# Altium PCB 精简焊台.PcbDoc
Units mil, origin at the board's own origin, x right, y up, seen from the top; angles counter-clockwise.
Board outline 2756 x 2101 mil, 2 copper layers (Top Layer, Bottom Layer), stack 12.8 mil thick; 94 components, 71 nets, 279 pads, 155 vias.
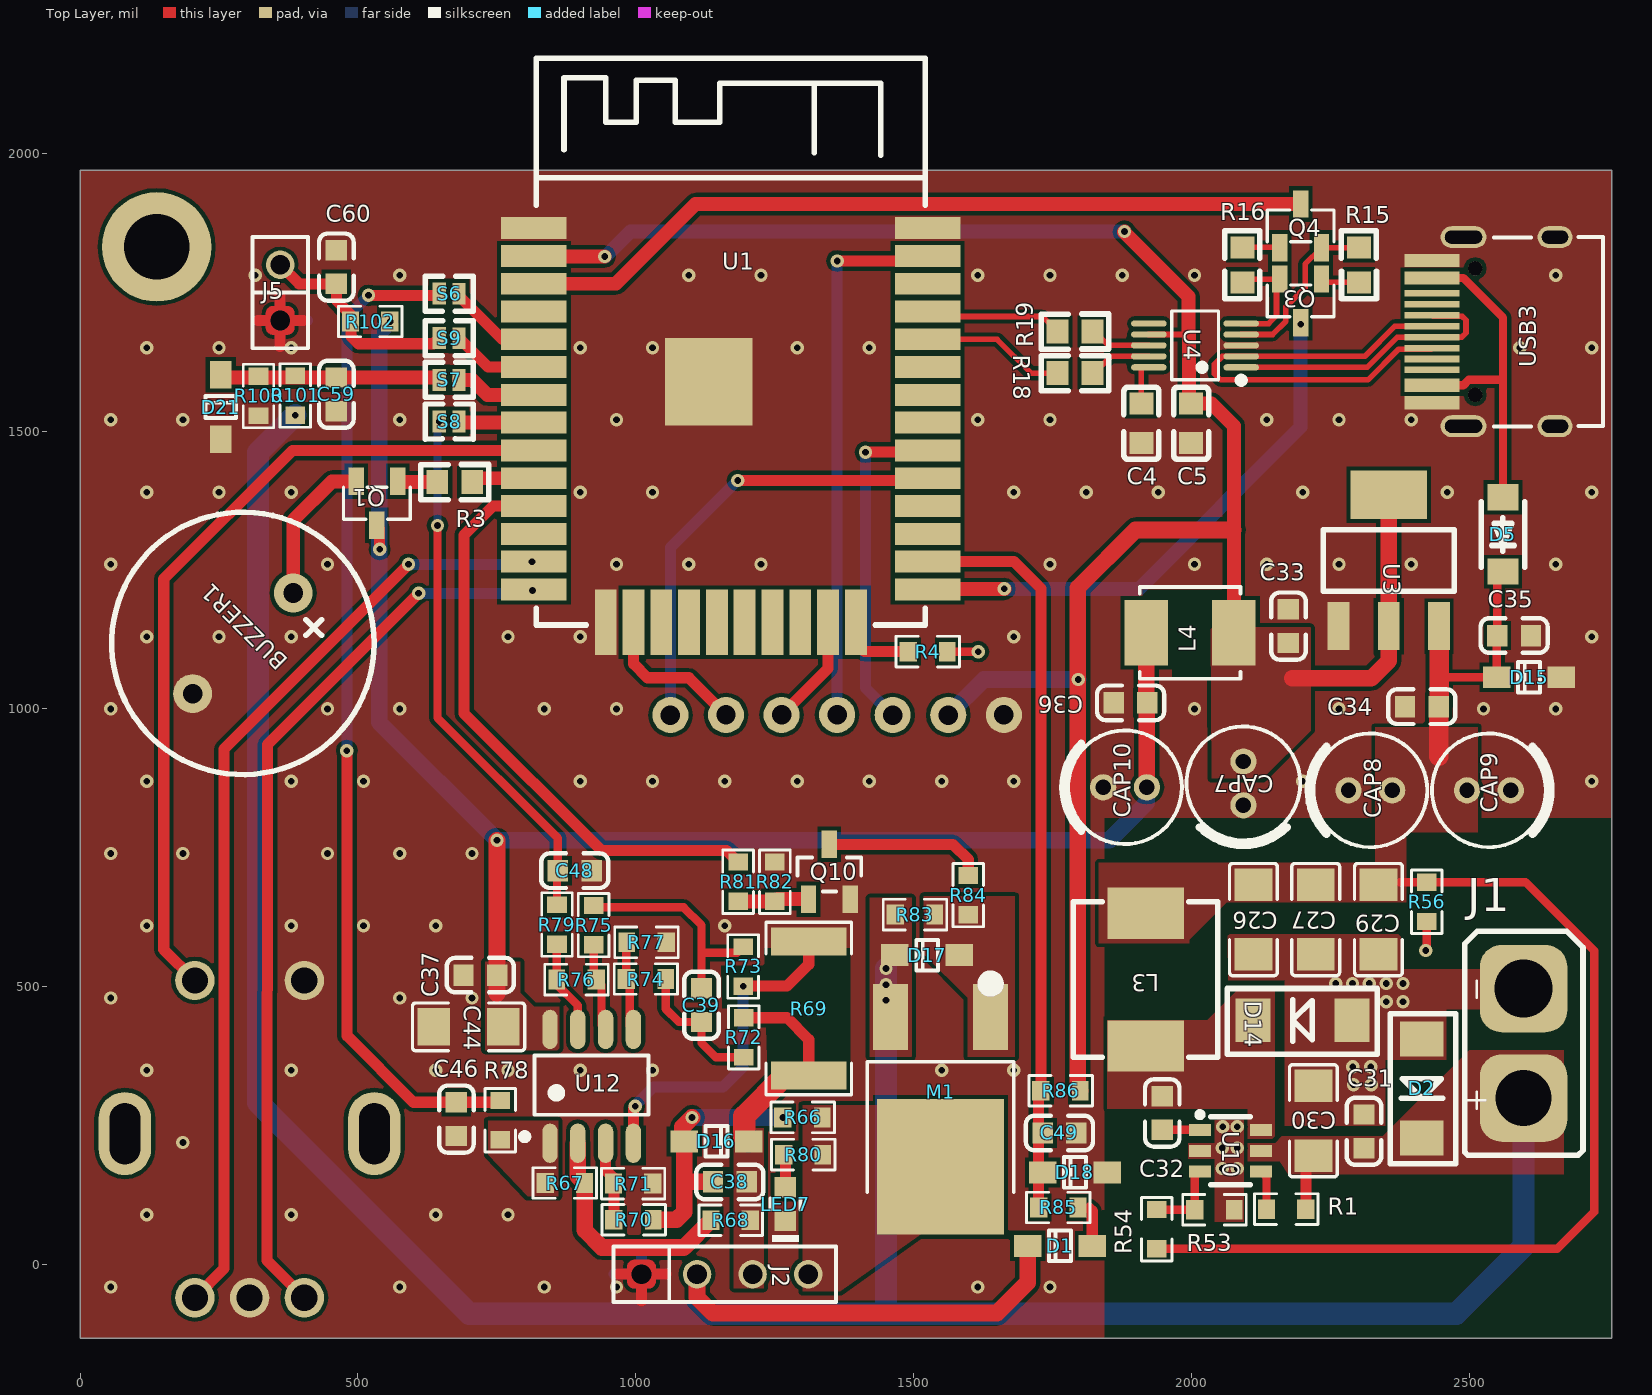
[diagram p0: Top Layer view]
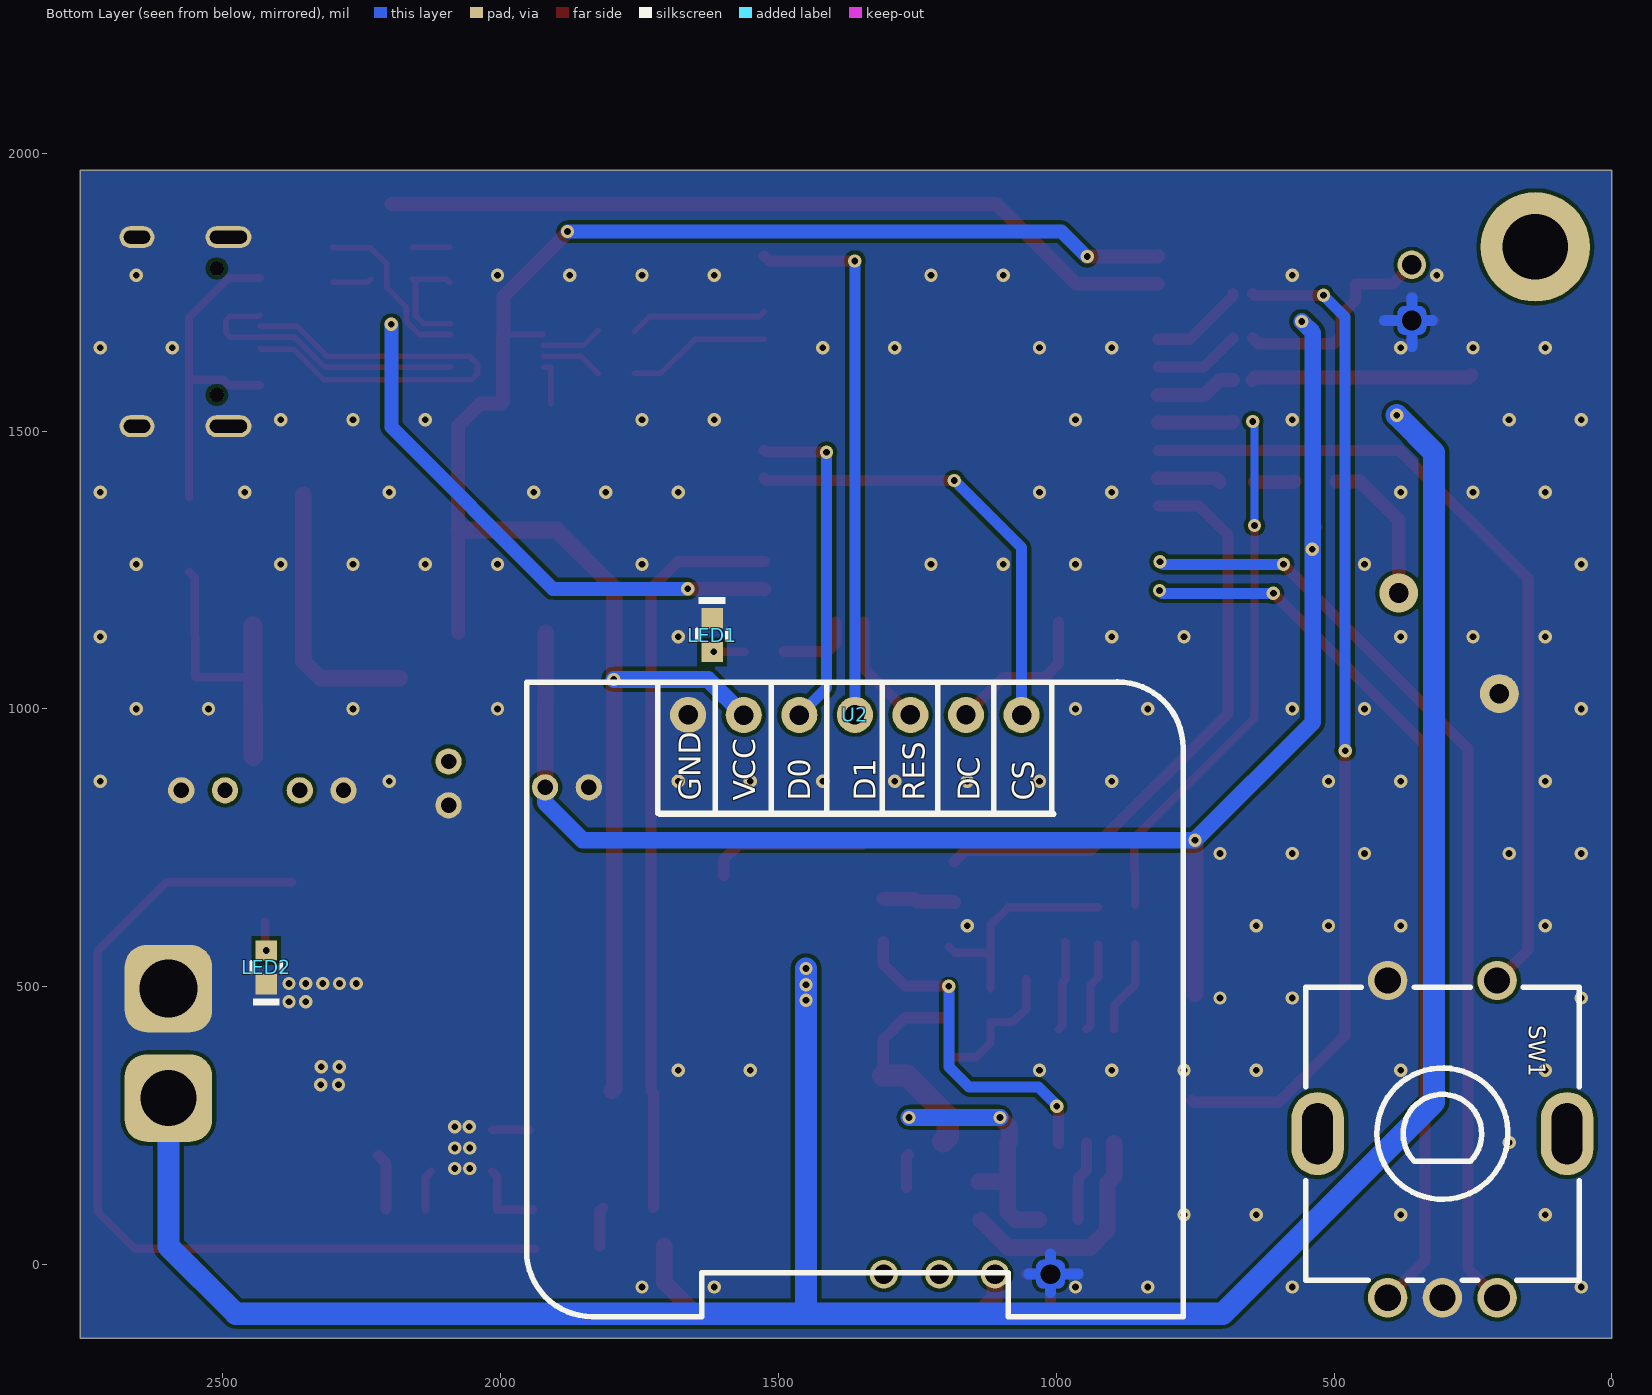
[diagram p1: Bottom Layer view, seen from below]
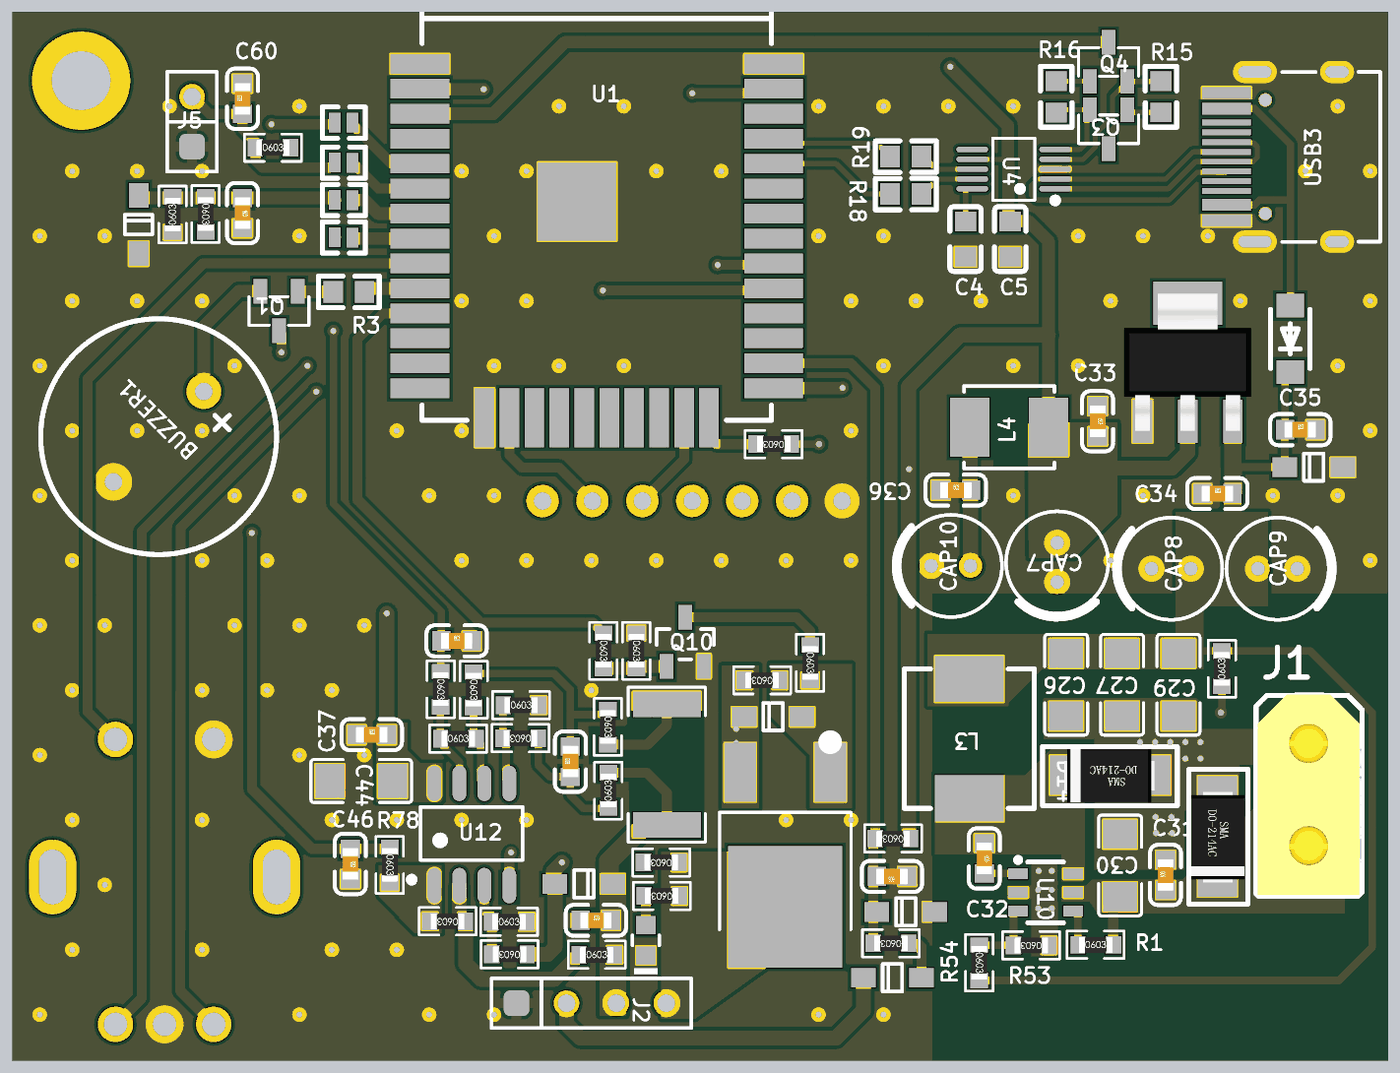
[diagram p2: 3D render of the assembled board from above, using the file's embedded part models]

## Layer stack, top to bottom
Top Solder: solder mask 0.4, Solder Resist, Dk 3.5
Top Layer: signal copper 1.4
Dielectric 1: core 10, FR-4, Dk 4.2
Bottom Layer: signal copper 1.4
Bottom Solder: solder mask 0.4, Solder Resist, Dk 3.5

## Board outline
0,-132 0,1969 2756,1969 2756,-132

## Design rules (kind name [scope] priority, off if disabled: settings)
Clearance [All] p1: gap=7 ignorepadtopadclearanceinfootprint=FALSE
PolygonConnect PolygonConnect_2 [All] p1: connectstyle=Direct reliefconductorwidth=10 reliefentries=4 polygonreliefangle="90 Angle" airgapwidth=10
PolygonConnect PolygonConnect_1 [IsVia] p2: connectstyle=Direct reliefconductorwidth=10 reliefentries=4 polygonreliefangle="90 Angle" airgapwidth=10
PolygonConnect [All] p3: connectstyle=Relief reliefconductorwidth=10 reliefentries=4 polygonreliefangle="90 Angle" airgapwidth=10
RoutingVias [All] p1: holewidth=28 width=50 viastyle="Through Hole" minholewidth=28 minwidth=50 maxholewidth=28 maxwidth=50
SolderMaskExpansion [All] p1: expansion=2.5
Width Width_1 [InNetClass('New Class')] p1: maxlimit=100 minlimit=10 preferedwidth=20
Width [All] p2: maxlimit=100 minlimit=10 preferedwidth=10
30 further rules are at their usual default settings.

## Classes and differential pairs
net class "New Class": 5V AVCC DVCC NetC38_2 NetD17_1 NetJ2_4 VBUS VIN

## Components (designator, comment, footprint, x,y, rotation, side; value= is the part's Value field where it differs from the comment)
BUZZER1 "GMC1205YA-16R2048" BUZ-TH_BD12.0-P6.50-D0.6-FD 293,1118 r45 top
C4 "1u" C0603 1909.5,1514 r270 top
C5 "10u" C0603 1999,1514 r90 top
C26 "10uF" 电容 2120,625 r270 top
C27 "10uF" 电容 2232.03,625 r270 top
C29 "0.1uF" 电容 2345,625 r270 top
C30 "4.7uF" 电容 2210,255 r90 top
C31 "0.1uF" 0603C 2310,240 r90 top
C32 "0.1uF" 0603C 1947,273 r270 top
C33 "0.1uF" 0603C 2174,1149 r270 top
C34 "0.1uF" 0603C 2414,1004 r0 top
C35 "0.1uF" 0603C 2580,1132 r0 top
C36 "0.1uF" 0603C 1890,1011 r0 top
C37 "0.1uF" 0603C 720,521 r0 top
C38 "0.1uF" 0603C 1169,149 r0 top
C39 "0.1uF" 0603C 1118,467 r90 top
C44 "4.7uF" 电容 695,437 r0 top
C46 "10nF" 0603C 677,262 r270 top
C48 "10nF" 0603C 890,709 r0 top
C49 "0.1uF" 0603C 1762,237 r180 top
C59 "1uF" 0603C 461,1566 r270 top
C60 "1uF" 0603C 461,1795 r90 top
CAP7 "22uF" CAPX-5.0 2093,866 r90 top
CAP8 "22uF" CAPX-5.0 2321.37,853.51 r0 top
CAP9 "100uF" CAPX-5.0 2534.63,853.51 r180 top
CAP10 "22uF" CAPX-5.0 1880,859 r0 top
D1 "1N4148" LC-SOD-123 1763,34 r0 top
D2 "TVS" "二极管 SMA(DO-214AC)" 2414,398.56 r270 top
D5 "1N5819HW-7-F" SOD-123_L2.8-W1.8-LS3.7-FD 2560,1314 r270 top
D14 "B5819" "二极管 SMA(DO-214AC)" 2280.56,440 r180 top
D15 "SMA6.0A" LC-SOD-123 2607,1057 r0 top
D16 "1N4148" LC-SOD-123 1145,222 r180 top
D17 "ZMM12" LC-SOD-123 1524,557 r0 top
D18 "SMF3.3A" LC-SOD-123 1789.81,166 r0 top
D21 "SMF3.3A" LC-SOD-123 253,1543 r270 top
J1 "GH 2P" "端子 (XT30-F）" 2598,496 r270 top
J2 "CONN4" SIP-4 1010,-17 r0 top
J5 "NTC 10K" SIP-2 360,1699 r90 top
L3 "22uH" 电感 1912,513 r90 top
L4 "22uH" LIN0520 1997,1137 r180 top
LED1 "LED" LC-0603-LED 1619,1132.69 r90 bottom
LED2 "LED" LC-0603-LED 2421,535 r270 bottom
LED7 "LED" LC-0603-LED 1269,109 r270 top
M1 "MOS-ASM6115" MOS-ASM6115 1573,279 r90 top
Q1 "S8050" SOT-23-3_L2.9-W1.3-P1.90-LS2.4-BR 534,1370 r90 top
Q3 "S8050" SOT-23-3_L2.9-W1.3-P1.90-LS2.4-BR 2196,1734 r90 top
Q4 "S8050" SOT-23-3_L2.9-W1.3-P1.90-LS2.4-BR 2196,1869 r270 top
Q10 "S8050" LC-SOT-23(SOT-23-3) 1348,707 r270 top
R1 "100K" 0603R 2170,100 r0 top
R3 "10k" R0603 674,1408 r0 top
R4 "2K" 0603R 1525,1103 r180 top
R15 "10k" R0603 2301,1799 r90 top
R16 "10k" R0603 2091,1799 r270 top
R18 "220R" R0603 1790,1604 r180 top
R19 "220R" R0603 1790,1679 r180 top
R53 "18K" 0603R 2041,99 r180 top
R54 "100K" 0603R 1937,64 r270 top
R56 "3K" 0603R 2423,653 r90 top
R66 "10K" 0603R 1300,265 r180 top
R67 "200K" 0603R 872,147 r180 top
R68 "2K" 0603R 1170.59,80 r0 top
R69 "0.02R" "检流电阻 - duplicate" 1321,458 r90 top
R70 "2K" 0603R 996,81 r180 top
R71 "200K" 0603R 995,146 r0 top
R72 "10R" 0603R 1194,409 r90 top
R73 "10R" 0603R 1193,536.57 r270 top
R74 "1K" 0603R 1018,514 r180 top
R75 "1K" 0603R 924,611 r270 top
R76 "20K" 0603R 893,513 r0 top
R77 "20K" 0603R 1019,580 r0 top
R78 "1K" 0603R 756,260 r270 top
R79 "10K" 0603R 858,612 r270 top
R80 "10K" 0603R 1301,198 r180 top
R81 "1K" 0603R 1184,689 r270 top
R82 "51K" 0603R 1250,689 r270 top
R83 "10K" 0603R 1502,630 r180 top
R84 "2K" 0603R 1598,665 r270 top
R85 "1K" 0603R 1760,103 r180 top
R86 "10K" 0603R 1764.22,313 r180 top
R100 "1K" 0603R 321,1563 r90 top
R101 "10K" 0603R 387,1564 r270 top
R102 "10K" 0603R 522,1697 r0 top
S6 "Solder" SW_HAND_WELD_JX 664,1747 r180 top
S7 "Solder" SW_HAND_WELD_JX 664,1592 r180 top
S8 "Solder" SW_HAND_WELD_JX 664,1517.09 r180 top
S9 "Solder" SW_HAND_WELD_JX 664,1667 r180 top
SW1 "Rotary Enc" SW-TH_PEC11R-4XXXF-SXXXX 305,226 r0 bottom
U1 "ESP32-S" WIRELM-SMD_ESP32-S 1170.67,1510.47 r0 top
U2 "0.96OLED" "OLED 12864 SPI 7P" 1362.05,989.15 r0 bottom
U3 "AMS1117" "LDO线性稳压 (SOT-223)" 2354.45,1267.11 r270 top
U4 "CH340E" MSOP-10_L3.0-W3.0-P0.50-LS5.0-BL 2006,1654 r90 top
U10 "LMR16006" "开关电源 (LMR16006)" 2085,210 r270 top
U12 "GS8552" LC-SOP-8-150MIL 920,321 r0 top
USB3 "USB-TYPEC-16P" USB-TYPE-C-16P 2653.7,1508.7 r90 top

## Footprints (in the part's own frame and the unit in brackets; to place one, negate y for a bottom-side part, rotate by r counter-clockwise, add the part's x,y. Pads: shape width x height; smd on the part's side, far side on the other; paste and mask are expansions set on the pad)
0603C [mm]
  rect 0.93x0.98 smd: 1(-0.77,0) 2(0.77,0)
  silkscreen extent -1.53,-0.79 1.54,0.79, body extent -0.8,-0.4 0.8,0.4, height 0.3
0603R [mm]
  rect 0.762x0.9 smd: 1(-0.9,0)
  rect 0.8x0.9 smd: 2(0.9,0)
  silkscreen extent -1.45,-0.7 1.45,0.7, body extent -0.85,-0.4 0.85,0.4, height 0.56
BUZ-TH_BD12.0-P6.50-D0.6-FD [mil]
  round 70 hole 35.4: 1(128,0) 2(-128,0)
  silkscreen extent -236,-236 236,236
C0603 [mm]
  rect 1x1.1 smd: 1(-0.9,0) 2(0.9,0)
  silkscreen extent -1.65,-0.8 1.65,0.8
CAPX-5.0 [mm]
  round 1.2 hole 0.7: 1(1,0) 2(-1,0)
  silkscreen extent -2.83,-2.6 2.6,2.6
LC-0603-LED [mm]
  rect 0.93x0.98 smd: A(-0.77,0) K(0.77,0)
  silkscreen extent -0.25,-0.69 1.72,0.69
LC-SOD-123 [mm]
  rect 1.25x1 smd: 1(1.475,0) 2(-1.475,0)
  silkscreen extent -0.5,-0.7 0.5,0.7
LC-SOP-8-150MIL [mm]
  oval 0.7x1.8 smd: 1(-1.893,-2.6) 2(-0.623,-2.6) 3(0.647,-2.6) 4(1.917,-2.6) 5(1.917,2.6) 6(0.647,2.6) 7(-0.623,2.6) 8(-1.893,2.6)
  silkscreen extent -3.2,-2.45 2.6,1.4
LC-SOT-23(SOT-23-3) [mm]
  rect 1.25x0.7 smd: 1(1.25,-0.95) 2(1.25,0.95) 3(-1.25,0)
  silkscreen extent -0.65,-1.46 0.9,1.46
"LDO线性稳压 (SOT-223)" [mm]
  rect 2.2x1 smd: 1(3,-2.3) 2(3,0) 3(3,2.3)
  rect 2.2x3.5 smd: 2(-3,0)
  silkscreen extent -1.4,-3 1.4,3, body extent -3.49,-3.24 3.49,3.24, height 1.64
LIN0520 [mm]
  rect 2x3 smd: 1(-2,0) 2(2,0)
  silkscreen extent -2.3,-2.1 2.3,2.1
MOS-ASM6115 [mm]
  rect 3x1.6 smd: 1(4.233,-1.662) 3(4.233,2.918)
  rect 6.2x5.8 smd: 2(-2.615,0.628)
  silkscreen extent -3.78,-2.72 6.06,3.97
MSOP-10_L3.0-W3.0-P0.50-LS5.0-BL [mm]
  oval 0.28x1.62 smd: 1(-1,-2.11) 2(-0.5,-2.11) 3(0,-2.11) 4(0.5,-2.11) 5(1,-2.11) 6(1,2.11) 7(0.5,2.11) 8(0,2.11) 9(-0.5,2.11) 10(-1,2.11)
  silkscreen extent -1.74,-2.26 1.58,1.07
"OLED 12864 SPI 7P" [mm]
  round 1.65 hole 0.89: 1(7.619,-0.001) 2(5.079,0.004) 3(2.539,0.004) 4(-0.001,-0.004) 5(-2.539,0.001) 6(-5.079,0.001) 7(-7.619,0.004)
  silkscreen extent -15,-1.5 15,27.5
R0603 [mm]
  rect 1x1.1 smd: 1(-0.8,0) 2(0.8,0)
  silkscreen extent -1.55,-0.8 1.55,0.81
SIP-2 [mm]
  round 0 hole 0.9: 1(0,0)
  round 1.3 hole 0.9: 2(2.54,0)
  Top Layer region: -0.65,0.325 -0.649,0.349 -0.646,0.373 -0.642,0.397 -0.636,0.421 -0.628,0.444 -0.618,0.466 -0.606,0.488 -0.594,0.508 -0.579,0.528 -0.563,0.546 -0.546,0.563 -0.528,0.579 -0.508,0.594 -0.488,0.606 -0.466,0.618 -0.444,0.628 -0.421,0.636 -0.397,0.642 -0.373,0.646 -0.349,0.649 -0.325,0.65 0.325,0.65 0.349,0.649 0.373,0.646 0.397,0.642 0.421,0.636 0.444,0.628 0.466,0.618 0.488,0.606 0.508,0.594 0.528,0.579 0.546,0.563 0.563,0.546 0.579,0.528 0.594,0.508 0.606,0.488 0.618,0.466 0.628,0.444 0.636,0.421 0.642,0.397 0.646,0.373 0.649,0.349 0.65,0.325 0.65,-0.325 0.649,-0.349 0.646,-0.373 0.642,-0.397 0.636,-0.421 0.628,-0.444 0.618,-0.466 0.606,-0.488 0.594,-0.508 0.579,-0.528 0.563,-0.546 0.546,-0.563 0.528,-0.579 0.508,-0.594 0.488,-0.606 0.466,-0.618 0.444,-0.628 0.421,-0.636 0.397,-0.642 0.373,-0.646 0.349,-0.649 0.325,-0.65 -0.325,-0.65 -0.349,-0.649 -0.373,-0.646 -0.397,-0.642 -0.421,-0.636 -0.444,-0.628 -0.466,-0.618 -0.488,-0.606 -0.508,-0.594 -0.528,-0.579 -0.546,-0.563 -0.563,-0.546 -0.579,-0.528 -0.594,-0.508 -0.606,-0.488 -0.618,-0.466 -0.628,-0.444 -0.636,-0.421 -0.642,-0.397 -0.646,-0.373 -0.649,-0.349 -0.65,-0.325
  Bottom Layer region: -0.65,0.325 -0.649,0.349 -0.646,0.373 -0.642,0.397 -0.636,0.421 -0.628,0.444 -0.618,0.466 -0.606,0.488 -0.594,0.508 -0.579,0.528 -0.563,0.546 -0.546,0.563 -0.528,0.579 -0.508,0.594 -0.488,0.606 -0.466,0.618 -0.444,0.628 -0.421,0.636 -0.397,0.642 -0.373,0.646 -0.349,0.649 -0.325,0.65 0.325,0.65 0.349,0.649 0.373,0.646 0.397,0.642 0.421,0.636 0.444,0.628 0.466,0.618 0.488,0.606 0.508,0.594 0.528,0.579 0.546,0.563 0.563,0.546 0.579,0.528 0.594,0.508 0.606,0.488 0.618,0.466 0.628,0.444 0.636,0.421 0.642,0.397 0.646,0.373 0.649,0.349 0.65,0.325 0.65,-0.325 0.649,-0.349 0.646,-0.373 0.642,-0.397 0.636,-0.421 0.628,-0.444 0.618,-0.466 0.606,-0.488 0.594,-0.508 0.579,-0.528 0.563,-0.546 0.546,-0.563 0.528,-0.579 0.508,-0.594 0.488,-0.606 0.466,-0.618 0.444,-0.628 0.421,-0.636 0.397,-0.642 0.373,-0.646 0.349,-0.649 0.325,-0.65 -0.325,-0.65 -0.349,-0.649 -0.373,-0.646 -0.397,-0.642 -0.421,-0.636 -0.444,-0.628 -0.466,-0.618 -0.488,-0.606 -0.508,-0.594 -0.528,-0.579 -0.546,-0.563 -0.563,-0.546 -0.579,-0.528 -0.594,-0.508 -0.606,-0.488 -0.618,-0.466 -0.628,-0.444 -0.636,-0.421 -0.642,-0.397 -0.646,-0.373 -0.649,-0.349 -0.65,-0.325
  silkscreen extent -1.27,-1.27 3.81,1.27
SIP-4 [mm]
  round 0 hole 0.9: 1(0,0)
  round 1.3 hole 0.9: 2(2.54,0) 3(5.08,0) 4(7.62,0)
  Top Layer region: -0.65,0.325 -0.649,0.349 -0.646,0.373 -0.642,0.397 -0.636,0.421 -0.628,0.444 -0.618,0.466 -0.606,0.487 -0.594,0.508 -0.579,0.528 -0.563,0.546 -0.546,0.563 -0.528,0.579 -0.508,0.594 -0.488,0.606 -0.466,0.618 -0.444,0.628 -0.421,0.636 -0.397,0.642 -0.373,0.646 -0.349,0.649 -0.325,0.65 0.325,0.65 0.349,0.649 0.373,0.646 0.397,0.642 0.421,0.636 0.444,0.628 0.466,0.618 0.488,0.606 0.508,0.594 0.528,0.579 0.546,0.563 0.563,0.546 0.579,0.528 0.594,0.508 0.606,0.487 0.618,0.466 0.628,0.444 0.636,0.421 0.642,0.397 0.646,0.373 0.649,0.349 0.65,0.325 0.65,-0.325 0.649,-0.349 0.646,-0.373 0.642,-0.397 0.636,-0.421 0.628,-0.444 0.618,-0.466 0.606,-0.488 0.594,-0.508 0.579,-0.528 0.563,-0.546 0.546,-0.563 0.528,-0.579 0.508,-0.594 0.488,-0.606 0.466,-0.618 0.444,-0.628 0.421,-0.636 0.397,-0.642 0.373,-0.646 0.349,-0.649 0.325,-0.65 -0.325,-0.65 -0.349,-0.649 -0.373,-0.646 -0.397,-0.642 -0.421,-0.636 -0.444,-0.628 -0.466,-0.618 -0.488,-0.606 -0.508,-0.594 -0.528,-0.579 -0.546,-0.563 -0.563,-0.546 -0.579,-0.528 -0.594,-0.508 -0.606,-0.488 -0.618,-0.466 -0.628,-0.444 -0.636,-0.421 -0.642,-0.397 -0.646,-0.373 -0.649,-0.349 -0.65,-0.325
  Bottom Layer region: -0.65,0.325 -0.649,0.349 -0.646,0.373 -0.642,0.397 -0.636,0.421 -0.628,0.444 -0.618,0.466 -0.606,0.487 -0.594,0.508 -0.579,0.528 -0.563,0.546 -0.546,0.563 -0.528,0.579 -0.508,0.594 -0.488,0.606 -0.466,0.618 -0.444,0.628 -0.421,0.636 -0.397,0.642 -0.373,0.646 -0.349,0.649 -0.325,0.65 0.325,0.65 0.349,0.649 0.373,0.646 0.397,0.642 0.421,0.636 0.444,0.628 0.466,0.618 0.488,0.606 0.508,0.594 0.528,0.579 0.546,0.563 0.563,0.546 0.579,0.528 0.594,0.508 0.606,0.487 0.618,0.466 0.628,0.444 0.636,0.421 0.642,0.397 0.646,0.373 0.649,0.349 0.65,0.325 0.65,-0.325 0.649,-0.349 0.646,-0.373 0.642,-0.397 0.636,-0.421 0.628,-0.444 0.618,-0.466 0.606,-0.488 0.594,-0.508 0.579,-0.528 0.563,-0.546 0.546,-0.563 0.528,-0.579 0.508,-0.594 0.488,-0.606 0.466,-0.618 0.444,-0.628 0.421,-0.636 0.397,-0.642 0.373,-0.646 0.349,-0.649 0.325,-0.65 -0.325,-0.65 -0.349,-0.649 -0.373,-0.646 -0.397,-0.642 -0.421,-0.636 -0.444,-0.628 -0.466,-0.618 -0.488,-0.606 -0.508,-0.594 -0.528,-0.579 -0.546,-0.563 -0.563,-0.546 -0.579,-0.528 -0.594,-0.508 -0.606,-0.488 -0.618,-0.466 -0.628,-0.444 -0.636,-0.421 -0.642,-0.397 -0.646,-0.373 -0.649,-0.349 -0.65,-0.325
  silkscreen extent -1.27,-1.27 8.89,1.27
SOD-123_L2.8-W1.8-LS3.7-FD [mm]
  rect 1.2x1.4 smd: 1(-1.7,0) 2(1.7,0)
  silkscreen extent -1.5,-1 1.5,1
SOT-23-3_L2.9-W1.3-P1.90-LS2.4-BR [mm]
  rect 1.25x0.7 smd: 1(1,-0.95) 2(1,0.95) 3(-1,0)
  silkscreen extent -0.73,-1.53 0.73,1.53
SW-TH_PEC11R-4XXXF-SXXXX [mm]
  round 1.8 hole 1.2: 1(2.5,-7.25) 2(-2.5,-7.25) A(2.5,7.25) B(-2.5,7.25) C(0,7.25)
  oval 2.4x3.8 hole 1.4 slot 2.8 at 90 deg: MT1(5.7,-0.25) MT2(-5.7,-0.25)
  silkscreen extent -6.25,-6.95 6.25,6.45
SW_HAND_WELD_JX [mm]
  rect 0.6x1 smd: 1(-0.45,0.002) 2(0.45,-0.003)
  silkscreen extent -1.1,-0.8 1.1,0.8
USB-TYPE-C-16P [mm]
  oval 1x2.1 hole 0.6 slot 1.7 at 90 deg: 0(0,4.18) 0(8.64,4.18)
  oval 1x1.6 hole 0.6 slot 1.2 at 90 deg: 0(0,0) 0(8.64,0)
  rect 0.6x2.5 smd: A1(1.07,5.625) A4(1.87,5.625) A9(6.77,5.625) A12(7.57,5.625)
  rect 0.3x2.5 smd: A5(3.07,5.625) A6(4.07,5.625) A7(4.57,5.625) A8(5.57,5.625) B5(6.07,5.625) B6(5.07,5.625) B7(3.57,5.625) B8(2.57,5.625)
  round 0.65 hole 0.65 slot 0.655 at 90 deg: G(1.43,3.65) G(7.21,3.65)
  silkscreen extent -0.01,-2.2 8.64,2.79
WIRELM-SMD_ESP32-S [mm]
  rect 3x1 smd: 1(-9,9.005) 2(-9,7.735) 3(-9,6.465) 4(-9,5.195) 5(-9,3.925) 6(-9,2.655) 7(-9,1.385) 8(-9,0.115) 9(-9,-1.155) 10(-9,-2.425) 11(-9,-3.695) 12(-9,-4.965) 13(-9,-6.235) 14(-9,-7.505) 25(9,-7.505) 26(9,-6.235) 27(9,-4.965) 28(9,-3.695) 29(9,-2.425) 30(9,-1.155) 31(9,0.115) 32(9,1.385) 33(9,2.655) 34(9,3.925) 35(9,5.195) 36(9,6.465) 37(9,7.735) 38(9,9.005)
  rect 1x3 smd: 15(-5.715,-9.005) 16(-4.445,-9.005) 17(-3.175,-9.005) 18(-1.905,-9.005) 19(-0.635,-9.005) 20(0.635,-9.005) 21(1.905,-9.005) 22(3.175,-9.005) 23(4.445,-9.005) 24(5.715,-9.005)
  rect 4x4 smd: 39(-1,1.995)
  silkscreen extent -8.89,-9.13 8.89,16.78
"二极管 SMA(DO-214AC)" [mil]
  rect 63x78.74 smd: 1(-8,0) 2(170.56,0)
  silkscreen extent -53,-57 217,61, body extent -8,-52 174,54, height 94
"开关电源 (LMR16006)" [mm]
  rect 0.55x1 smd: 1(-0.823,-1.786) 2(0.127,-1.786) 3(1.077,-1.786) 4(1.077,1.014) 5(0.127,1.014) 6(-0.823,1.014)
  silkscreen extent -1.65,-1.91 1.68,0.51
"检流电阻 - duplicate" [mil] "2512"
  rect 50.49x136.06 smd: 1(-117.75,10.03) 2(123.68,10.03)
  silkscreen extent -152,-67 158,87
电容 [mm] "1206"
  rect 1.485x1.728 smd: 1(-1.493,-0.228) 2(1.692,-0.228)
  silkscreen extent -2.46,-1.32 2.66,0.86
电感 [mm] "220"
  rect 2.35x3.5 smd: 1(-3.035,-0.127) 2(3.035,-0.127)
  silkscreen extent -3.55,-3.43 3.55,3.17
"端子 (XT30-F）" [mm]
  rrect50% 4x4 hole 2.56: 1(4.981,-0.026)
  rrect50% 4x4 hole 2.65: 2(-0.019,-0.026)
  silkscreen extent -2.64,-2.71 7.59,2.69, body extent -2.79,-2.63 7.61,2.67, height 12.6

## Part data
BUZZER1: BOM_JLCPCB Part Class="Extended Part", BOM_Manufacturer=INGHAi, BOM_Manufacturer Part=GMC1205YA-16R2048, BOM_Supplier=LCSC, BOM_Supplier Part=C252915, Contributor=LCSC, spicePre=B, spiceSymbolName=GMC1205YA-16R2048
D2: library part B5819, Contributor=47415Y, spicePre=D, spiceSymbolName=DIO
D5: BOM_JLCPCB Part Class="Extended Part", BOM_Manufacturer=DIODES, BOM_Assembly Type=smtWeld, BOM_Manufacturer Part=1N5819HW-7-F, BOM_Paste Type=expand, BOM_Supplier=LCSC, BOM_Supplier Part=C82544, image=//image.lceda.cn/szlcsc/C82544.jpg, spicePre=D, spiceSymbolName=1N5819HW-7-F
Q1 Q3 Q4: BOM_JLCPCB Part Class="Extended Part", BOM_Manufacturer=WPMtek(维攀微), BOM_Manufacturer Part=S8050, BOM_Supplier=LCSC, BOM_Supplier Part=C2688231, Contributor=LCSC, spicePre=Q, spiceSymbolName=S8050
R1 R53: library part 2K, Contributor=47415Y, spicePre=R, spiceSymbolName=RES
R54: library part 10K, Contributor=47415Y, spicePre=R, spiceSymbolName=RES
SW1: BOM_JLCPCB Part Class="Extended Part", BOM_Manufacturer=BOURNS, BOM_Manufacturer Part=PEC11R-4015F-S0024, BOM_Supplier=LCSC, BOM_Supplier Part=C143789, Contributor=LCSC, spicePre=S, spiceSymbolName=PEC11R-4015F-S0024
U1: BOM_JLCPCB Part Class="Extended Part", BOM_Manufacturer=Ai-Thinker, Package Display=No, BOM_Manufacturer Part=ESP32-S, BOM_Supplier=LCSC, BOM_Supplier Part=C277944, Contributor=LCSC, spicePre=U, spiceSymbolName=ESP32-S
U3: "线性稳压3.3V-5V 1A"
U4: BOM_JLCPCB Part Class="Extended Part", BOM_Manufacturer=WCH, BOM_Manufacturer Part=CH340E, BOM_Paste Type=recommend, BOM_Supplier=LCSC, BOM_Supplier Part=C99652, spicePre=U, spiceSymbolName=CH340E
U10: library part HT7463B, Contributor=47415Y, spicePre=U, spiceSymbolName=HT7463B
C4 C5: Contributor=LCEDA_Lib, nameAlias=Value(F), spicePre=C, spiceSymbolName=C_0603_US
C26 C27 C29 C30 C31 C32 C33 C34 C35 C36 C37 C38 C39 C44 C46 C48 C49 C59 C60: Contributor=47415Y, spicePre=C, spiceSymbolName=CAP
CAP7 CAP8 CAP9 CAP10: Contributor=47415Y, spicePre=C, spiceSymbolName=CAPX
D1 D14 D15 D16 D18 D21: Contributor=47415Y, spicePre=D, spiceSymbolName=DIO
D17: Contributor=47415Y, spicePre=D, spiceSymbolName=ZER
J2: Contributor=47415Y, spicePre=J, spiceSymbolName=CONN4
J5: Contributor=47415Y, spicePre=J, spiceSymbolName=CONN2
L3 L4: Contributor=47415Y, spicePre=L, spiceSymbolName=LIN
LED1 LED2 LED7: Contributor=47415Y, spicePre=L, spiceSymbolName=LED
Q10: Contributor=47415Y, spicePre=Q, spiceSymbolName=NPN
R3 R15 R16 R18 R19: Contributor=LCEDA_Lib, nameAlias=Value(Ω), spicePre=R, spiceSymbolName=R_0603_EU
R4 R56 R66 R67 R68 R69 R70 R71 R72 R73 R74 R75 R76 R77 R78 R79 R80 R81 R82 R83 R84 R85 R86 R100 R101 R102: Contributor=47415Y, spicePre=R, spiceSymbolName=RES
S6 S7 S8 S9: BOM_Mounted=No, spicePre=S
U2: Contributor=jhsdhdhusdisd, spicePre=U, spiceSymbolName=0.96OLED
U12: Contributor=47415Y, spicePre=U, spiceSymbolName=LM358, subpart_no=1
USB3: Contributor=47415Y, spicePre=U, spiceSymbolName=USB-TYPEC-16P

## Free pads (board coordinates)
  round 196.85 hole 118.11 unplated: 8(137.8,1831.2)

## Via types
v1: diameter 24, hole 12, Top Layer to Bottom Layer, 109 vias
v2: diameter 24/24 (per signal layer), hole 12, Top Layer to Bottom Layer, tented both sides, 46 vias

## Nets (pads, with @x,y where several pads share a name; then routed paths per layer and width w, separated by ;. In a path a pad name is that pad's centre, name@x,y a point inside that pad or via, vN(x,y) a via of type N, cw(c..) or ccw(c..) an arc to the next point about the centre after c; other vN are vias at no path point)
5V: C26.1 C27.1 C29.1 C34.2 C35.1 CAP8.1 CAP9.1 D5.2 D15.2 L3.2 R54.2 R56.2 U3.3 | length 2218.2
  Top Layer w15: R54.2 2657.57,28.57 2724,95 2724,565 2600.57,688.43 R56.2 2374.57,688.43 ; 2445.32,1057 D15.2 2548.93,1131.24 C35.1 2549.69,1236.76 D5.2
  Top Layer w35: 2444.32,914.68 C34.2 2445.32,1005 2445.32,1057 2445,1057.32 U3.3
AVCC: C36.2 C37.2 C44.2 CAP10.1 L4.2 Q1.3 R102.2 U12.8 | length 2858.4
  Top Layer w20: Q1.3@531,1327.63 Q1.3 539,1325.63 v2(539,1287)
  Top Layer w30: 750,488 v2(750,764) ; L4.2 1918.26,1011.16 1919.37,1010.06 CAP10.1
  Bottom Layer w30: v2(558,1697) 538,1677 538,976 v2(750,764) 1852,764 1919.37,831.37 CAP10.1
DVCC: C5.2 C33.2 CAP7.1 L4.1 R86.1 U1.2 U2.2 U3.2 U4.7 | length 3954.6
  Top Layer w10: U4.7 1994.32,1673.68 1995,1673
  Top Layer w25: U1.2 817.34,1814 v2(944,1814) ; v2(1879,1859) 1878,1858 1994.32,1741.68 1994.32,1673.68 ; 1995,1673 1995,1553.44 C5.2 2035.57,1549.43 2075.74,1509.26 L4.1
  Top Layer w30: R86.1 1795.01,317.64 1795.01,1218.01 1899,1322 2075,1322 ; 2181,1055 2323,1055 2354.45,1086.45 2354.45,1149 U3.2@2354.45,1385.22
  Bottom Layer w25: v2(944,1814) 945,1814 990,1859 v2(1879,1859)
  Bottom Layer w30: U2.2 1626,1053 v2(1796,1053)
GND: BUZZER1.2 C4.2 C5.1 C26.2 C27.2 C29.2 C30.2 C31.2 C33.1 C34.1 C35.2 C36.1 C37.1 C44.1 C46.2 C48.2 C49.1 C59.2 C60.2 CAP7.2 CAP8.2 CAP9.2 CAP10.2 D2.1 D14.1 D15.1 D18.1 D21.1 J1.2 J2.1 J5.1 LED1.K LED2.K LED7.K Q10.2 R53.1 R69.2 R71.2 R73.2 R77.2 R82.1 R100.1 SW1.1 SW1.C U1.1 U1.15 U1.38 U1.39 U2.1 U3.1 U4.3 U10.2 U12.4 USB3.0 USB3.A1 USB3.A12 | length 1251.1
  Top Layer w20: 320,1699 J5.1 ; 360,1652 J5.1 ; 360,1742 J5.1 ; 402,1699 J5.1 ; 968,-17 J2.1 ; U12.4 995.47,281.47 v2(999,285) ; 1010,-65 J2.1 ; 1054,-17 J2.1 ; v2(1193,501.13) 1272.13,501.13 1310.97,539.97 R69.2
  Bottom Layer w20: 324,1699 J5.1 ; 360,1652 J5.1 ; 360,1739 J5.1 ; 409,1699 J5.1 ; 961,-17 J2.1 ; v2(999,285) 997,285 1032,320 1157,320 1193,356 v2(1193,501.13) ; 1010,-50 J2.1 ; 1010,19 J2.1 ; 1049,-17 J2.1
  other v1: 55,-40 575,-40 835,-40 965,-40 1615,-40 1745,-40 120,90 380,90 640,90 770,90 185,220 120,350 380,350 640,350 770,350 900,350 1030,350 1550,350 1680,350 55,480 575,480 705,480 120,610 380,610 510,610 640,610 1160,610 55,740 185,740 445,740 575,740 705,740 120,870 380,870 510,870 900,870 1030,870 1160,870 1290,870 1420,870 1550,870 1680,870 2200,870 2720,870 55,1000 445,1000 575,1000 835,1000 965,1000 2005,1000 2265,1000 2525,1000 2655,1000 120,1130 250,1130 380,1130 770,1130 900,1130 1680,1130 2720,1130 55,1260 445,1260 965,1260 1095,1260 1225,1260 1745,1260 2005,1260 2135,1260 2265,1260 2395,1260 2655,1260 120,1390 250,1390 380,1390 900,1390 1030,1390 1680,1390 1810,1390 1940,1390 2200,1390 2460,1390 2720,1390 55,1520 185,1520 575,1520 965,1520 1615,1520 1745,1520 2135,1520 2265,1520 2395,1520 120,1650 250,1650 380,1650 900,1650 1030,1650 1290,1650 1420,1650 2590,1650 2720,1650 315,1780 575,1780 1095,1780 1225,1780 1615,1780 1745,1780 1875,1780 2005,1780 2655,1780
  other v2: 2055,173 2082,173 2055,210 2082,210 2056,248 2082,248 2291,324 2323,324 2290,356 2322,356 2349.75,473 2380,473 2259,506 2289.25,506 2319.5,506 2349.75,506 2380,506
NetBUZZER1_1: BUZZER1.1 Q1.2 | length 273
  Top Layer w25: BUZZER1.1 383.51,1339.51 453.37,1409.37 Q1.2
NetC4_1: C4.1 U4.10 | length 78.6
  Top Layer w10: C4.1 1909.5,1614.63 U4.10
NetC32_1: C32.1 D14.2 L3.1 U10.6
NetC32_2: C32.2 U10.1 | length 67.8
  Top Layer w15: C32.2 2014.4,242.68 U10.1
NetC38_1: C38.1 D16.1 R66.2 R70.1 | length 454.1
  Top Layer w30: R70.1 1073,81 1086.93,94.93 1086.93,148 ; D16.1@1083.93,222 1083.93,247.93 v2(1101,265) ; D16.1 1086.93,148 ; C38.1 1087.93,149 1086.93,148
  Bottom Layer w30: v2(1101,265) v2(1264.57,265)
NetC38_2: C38.2 D16.2 J2.3 R68.2 R69.1 R72.2 | length 392.8
  Top Layer w20: R72.2 1271.57,444.43 1310.97,405.03 R69.1
  Top Layer w40: D16.2 1195,230.07 1195,267.08 1268.17,340.25 R69.1
NetC39_1: C39.1 R72.1 R74.1 | length 252.1
  Top Layer w15: R74.1 1053.43,460.57 1077.31,436.69 C39.1 1118,399 1143.43,373.57 R72.1
NetC39_2: C39.2 R73.1 R75.1 | length 400.5
  Top Layer w15: R75.1@924,643 1086,643 1118,611 C39.2 ; 1118,561 1182,561 R73.1
NetC46_1: C46.1 R78.1 S6.2 | length 1804.6
  Top Layer w20: v2@480,926 v2(480,925) 480,412 599.69,292.31 C46.1 752.88,292.31 R78.1 ; v2(519,1744) 643.17,1744 S6.2
  Bottom Layer w20: v2(480,925) 480,1705 v2(519,1744)
NetC48_1: C48.1 R79.1 S8.2 | length 961.6
  Top Layer w15: v2(643,1330) 643,984 859.69,767.31 C48.1 858,707.31 R79.1
  Bottom Layer w15: v2(643,1330) 643,1513.92 v2(646.28,1517.2)
NetC49_2: C49.2 D18.2 R85.2 R86.2 U1.26 | length 1339
  Top Layer w20: U1.26 1680,1265 1728.78,1216.22 R86.2 1724.57,308.78 R85.2
NetC59_1: C59.1 D21.2 R100.2 R101.1 S7.2 | length 397
  Top Layer w25: D21.2 257.75,1596.31 C59.1 642.08,1596.31 S7.2
NetC60_1: C60.1 J5.2 R102.1 S9.2 | length 388.9
  Top Layer w20: J5.2 394.31,1764.69 C60.1 461,1735 487.57,1708.43 487.57,1670.43 501,1657 636.17,1657 S9.2
NetD1_1: D1.1 R85.1 | length 70.3
  Top Layer w20: 1815.43,102 1821.07,96.36 D1.1
NetD1_2: D1.2 J2.2 | length 737.3
  Top Layer w30: J2.2 1110,-59 1138,-87 1650,-87 1704.93,-32.07 D1.2
NetD17_1: D17.1 M1.1 R83.1 R84.2
NetJ2_4: J2.4 M1.2 R66.1 R80.1
NetLED1_A: LED1.A R4.1 | length 55.6
  Top Layer w15: R4.1 v2(1616,1103)
NetLED2_A: LED2.A R56.1 | length 53.1
  Top Layer w15: v2(2421,565.32) 2423,567.32 R56.1
NetLED7_A: LED7.A R80.2 | length 60.1
  Top Layer w20: R80.2 1269,194.57 LED7.A
NetQ1_1: Q1.1 R3.1 | length 71.7
  Top Layer w25: Q1.1 572.77,1408 R3.1
NetQ3_1: Q3.1 R15.1 | length 70
  Top Layer w10: Q3.1 2239.26,1767.51 R15.1
NetQ3_2: Q3.2 R16.2 U4.5 | length 207.7
  Top Layer w10: U4.5 2138.37,1693.37 2152.5,1707.5 2152.5,1767.27 Q3.2 2096.86,1773.37 R16.2
NetQ3_3: Q3.3 U1.25 | length 977
  Top Layer w25: U1.25 1525.47,1215.47 1662.47,1215.47 v2(1663,1216)
  Bottom Layer w25: v2(1663,1216) 1905,1216 2196,1507 v2(2196,1692)
NetQ4_1: Q4.1 R16.1 | length 68
  Top Layer w10: R16.1 2157.74,1830.49 Q4.1
NetQ4_2: Q4.2 R15.2 U4.4 | length 316.9
  Top Layer w10: U4.4 2145.68,1673.68 2169.5,1697.5 2169.5,1723.49 2204,1757.99 2204,1800.23 Q4.2 2300.14,1829.63 R15.2
NetQ4_3: Q4.3 U1.3 | length 1439
  Top Layer w25: U1.3 964,1765 1107.37,1908.37 Q4.3
NetQ10_1: Q10.1 R81.2 R82.2 | length 128.8
  Top Layer w25: R81.2@1184,652.57 1185,653.57 R82.2 1254.22,657.79 Q10.1
NetQ10_3: Q10.3 R84.1 | length 289.8
  Top Layer w20: Q10.3 1570.79,756.21 1598,729 R84.1
NetR1_1: R1.1 U10.4 | length 71.6
  Top Layer w15: U10.4 2134.57,157.95 R1.1
NetR3_2: R3.2 U1.10 | length 113.7
  Top Layer w25: R3.2 712.5,1415 U1.10
NetR4_2: R4.2 U1.24 | length 137.9
  Top Layer w20: U1.24 1395.67,1118.33 1411,1103 R4.2
NetR18_1: R18.1 U4.9 | length 111.5
  Top Layer w10: R18.1@1824,1603.99 1854.33,1634.31 U4.9
NetR18_2: R18.2 U1.34 | length 258.8
  Top Layer w10: U1.34 1650,1665 1711,1604 R18.2
NetR19_1: R19.1 U4.8 | length 109.9
  Top Layer w10: R19.1@1824,1680.51 1850.51,1654 U4.8
NetR19_2: R19.2 U1.35 | length 248.4
  Top Layer w10: U1.35 1534,1706 1731.51,1706 R19.2
NetR53_2: R53.2 R54.1 U10.3 | length 137.9
  Top Layer w15: R54.1@1940.43,100 1941.43,99 R53.2 2005.57,158.48 U10.3
NetR67_1: R67.1 R68.1 U12.2 | length 422.1
  Top Layer w30: U12.2 895.47,158.96 R67.1 908,146.43 908,62 939,31 1086.16,31 R68.1
NetR67_2: R67.2 R78.2 U12.1
NetR70_2: R70.2 R71.1 U12.3 | length 143.9
  Top Layer w20: U12.3 945.47,170.53 959.57,156.43 R71.1 960.57,145 R70.2
NetR74_2: R74.2 R77.1 U12.5 | length 162.4
  Top Layer w15: R77.1 982.57,579 R74.2 989,507.57 989,429.83 U12.5
NetR75_2: R75.2 R76.2 U12.6 | length 161.1
  Top Layer w15: R75.2 924,517.43 R76.2 938,503.43 938,430.83 U12.6
NetR76_1: R76.1 R79.2 U12.7 | length 169.1
  Top Layer w15: R79.2 857.57,576.13 R76.1 857.57,504.43 895.47,466.53 U12.7
NetR81_1: R81.1 U1.11 | length 1071.7
  Top Layer w20: U1.11 743,1365 691,1313 691,992 937.71,745.29 1163.14,745.29 R81.1
NetS6_1: S6.1 U1.5 | length 170.7
  Top Layer w20: S6.1 681.72,1743.28 760,1665 U1.5
NetS7_1: S7.1 U1.7 | length 145.8
  Top Layer w25: S7.1 706.09,1591.91 733,1565 U1.7
NetS8_1: S8.1 U1.8 | length 135.4
  Top Layer w25: S8.1 683.72,1515 U1.8
NetS9_1: S9.1 U1.6 | length 156.1
  Top Layer w20: S9.1 733.63,1615 U1.6
NetSW1_2: SW1.2 U1.9 | length 1507
  Top Layer w20: SW1.2 150.49,567.51 150.49,1233.49 382,1465 U1.9
NetSW1_A: SW1.A U1.14 | length 1614.9
  Top Layer w20: SW1.A 336.49,7.5 336.49,48 337,936 v2(609,1208)
  Bottom Layer w20: v2(609,1208) 809,1208 v2(814,1213)
NetSW1_B: SW1.B U1.13 | length 1702.7
  Top Layer w20: SW1.B 259,-7 259,928 v2(591,1260)
  Bottom Layer w20: v2(591,1260) 808,1260 v2(813,1265)
NetU1_12: U1.12
NetU1_16: U1.16 U2.6 | length 279.2
  Top Layer w20: U1.16 995.67,1081.33 1021,1056 1095.2,1056 U2.6
NetU1_23: U1.23 U2.5 | length 201.5
  Top Layer w20: U2.5 1345.67,1072.67 U1.23
NetU1_27: U1.27
NetU1_28: U1.28
NetU1_29: U1.29 U2.7 | length 815.7
  Top Layer w20: v2(1183,1411) 1521,1411 U1.29
  Bottom Layer w20: U2.7 1062.1,1290.1 v2(1183,1411)
NetU1_30: U1.30 U2.3 | length 606.5
  Top Layer w20: v2(1413,1462) 1522,1462 U1.30
  Bottom Layer w20: v2(1413,1462) 1413,1038 U2.3
NetU1_33: U1.33
NetU1_36: U1.36
NetU1_37: U1.37 U2.4 | length 983.4
  Top Layer w20: v2(1362,1806) 1516,1806 U1.37
  Bottom Layer w20: U2.4 v2(1362,1806)
NetU2_2: 
NetU4_1: U4.1 USB3.A6 USB3.B6 | length 517.8
  Top Layer w10: U4.1 2315.67,1614.63 2369.98,1668.94 USB3.A6 2485.78,1668.94 2493.45,1676.61 2493.45,1699.5 2486.42,1706.53 2434.02,1706.53 USB3.B6
NetU4_2: U4.2 USB3.A7 USB3.B7 | length 856.4
  Top Layer w10: USB3.B7 2430.47,1647.48 2372.56,1647.48 2317.08,1592 2052,1592 2041,1603 2041,1620.31 2055,1634.31 U4.2 2311.31,1634.31 2365.62,1688.62 USB3.A7
PGND: 
VBUS: D5.1 USB3.A4 USB3.A9 | length 612.1
  Top Layer w15: USB3.A4 2488.62,1582.32 2498.59,1592.3 2560,1592.3 ; USB3.A9 2488.62,1775.24 2560,1703.86 D5.1
VIN: C30.1 C31.1 D2.2 D17.2 J1.1 M1.3 R1.2 R83.2 R101.2 U10.5 | length 4738.6
  Top Layer w20: R1.2 2205.43,182.68 C30.1
  Bottom Layer w40: v2(387,1528.57) 320,1461.57 320,292 700,-88 1450,-88 ; v2(1450,533) 1450,-88 ; J1.1 2596.98,32.98 2476,-88 1450,-88
  other v2: 1450,476 1450,504
pads on no net: SW1.MT1 SW1.MT2 U1.4 U1.17 U1.18 U1.19 U1.20 U1.21 U1.22 U1.31 U1.32 U4.6 USB3.A5 USB3.A8 USB3.B5 USB3.B8 USB3.G

## Polygon pours and split planes (outlines as drawn)
GND on Top Layer "GND_L02_P-001" (solid, remove dead copper, pour order 50): 1843,-132 1843,804 2754,804 2755,803 2755,1968 1,1968 0,1969 0,-132
DVCC on Top Layer "GND_L02_P-001" (solid, remove dead copper, pour order 14): 2034,1147 2213,1147 2214,1146 2214,961 2128,875 2036,875
AVCC on Top Layer "GND_L02_P-001" (solid, remove dead copper, pour order 10): 792,545 792,489 817,464 862,464 862,386 849,386 729,386 729,545
NetD17_1 on Top Layer "GND_L02_P-001" (solid, remove dead copper, pour order 48): 1518,663 1682,663 1682,374 1597,374 1597,480 1518,559
VIN on Top Layer "GND_L02_P-001" (solid, remove dead copper, pour order 46): 1496,660 1496,375 1497,374 1421,374 1421,660
5V on Top Layer "GND_L02_P-001" (solid, remove dead copper, pour order 4): 1833,578 1996,578 1996,585 2063,652 2386,652 2386,778 2515,778 2515,967 2330,967 2330,723 1833,723
GND on Top Layer "GND_L02_P-001" (solid, remove dead copper, pour order 40): 1994,219 2041,219 2041,261 2094,261 2094,77 2041,77 2041,191 1994,191
GND on Top Layer "GND_L02_P-001" (solid, remove dead copper, pour order 38): 2064.51,595 2375,595 2376,594 2376,532 2651,532 2651,460 2458,460 2458,369 2348,369 2348,250 2167,250 2167,513 2166,512 2065.51,512
NetR67_2 on Top Layer "GND_L02_P-001" (solid, remove dead copper, pour order 12): 860,259 860,123 805.29,123 734,197.74 734,259
VIN on Top Layer "GND_L02_P-001" (solid, remove dead copper, pour order 0): 2669,163 2669,386 2499,386 2344,231 2162,231 2150,219 2101,219 2101,186 2158,186 2174.1,163
NetC32_1 on Top Layer "GND_L02_P-001" (solid, remove dead copper, pour order 2): 2101,227 2148,227 2149,226 2149,492 2080,492 2028,440 1848,440 1848,281 2101,281
NetJ2_4 on Top Layer "GND_L02_P-001" (solid, remove dead copper, pour order 42): 1322,287 1524,287 1524,63.15 1368,-48 1347,-48 1300,-48 1300,287 1303,287
NetC38_2 on Top Layer "GND_L02_P-001" (solid, remove dead copper, pour order 44): 1176,245.5 1230,245.5 1230,-42 1176,-42
GND on Bottom Layer "Top Layer-No Net" (solid, pour order 52): 0,-132 0,1969 2756,1969 2756,-132

## Other copper
Top Layer:
  pour cut-out: 1154,538 1232,538 1232,462 1233,461 1155,461
  pour cut-out: 1231,569 1388,569 1386,567 1386,371.27 1237.16,371.27 1235.94,372.49
  pour cut-out: 1912,1214 2055,1214 2055,1203.91 2055.86,1203.06 2029.37,1203.06 2029.37,1148.89 2027.41,1146.93 2027.41,1058.59 2028,1058 1965,1058 1965,1070.58 1964.63,1070.94 1964.63,1203.06 1912.05,1203.06 1912,1203
  pour cut-out: 973,250 1018,250 1018,179 973,179

## Silkscreen, mask and mechanical layers (free items; w line width, h text height)
Mechanical 1:
  the board outline again, w10

## Text inside footprints (layer, text, board x,y; h text height)
U2: Bottom Overlay "GND" at 1639.52,834.54 h39.37 r270; Bottom Overlay "VCC" at 1541.02,834.54 h39.37 r270; Bottom Overlay "D0" at 1442.62,834.54 h39.37 r270; Bottom Overlay "D1" at 1324.22,834.54 h39.37 r270; Bottom Overlay "RES" at 1235.92,834.54 h39.37 r270; Bottom Overlay "DC" at 1137.52,834.54 h39.37 r270; Bottom Overlay "CS" at 1039.03,834.54 h39.37 r270